# EAGLE board GPS lure (EAGLE 7.6.0)
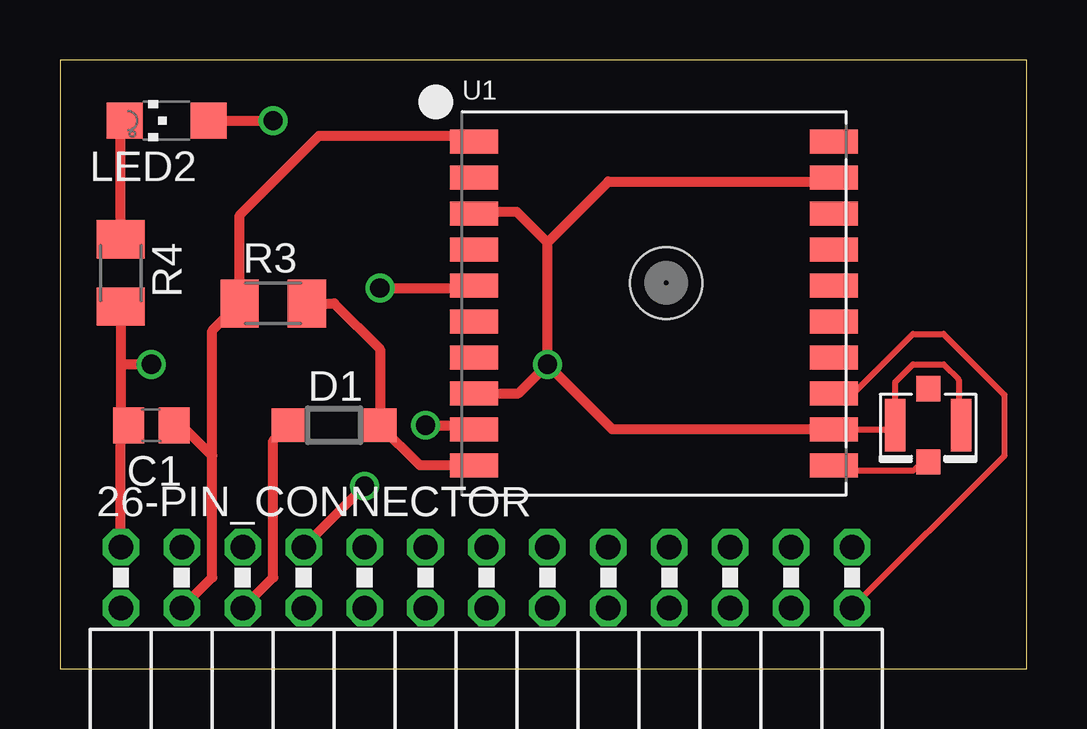
[diagram p0: board, top side]
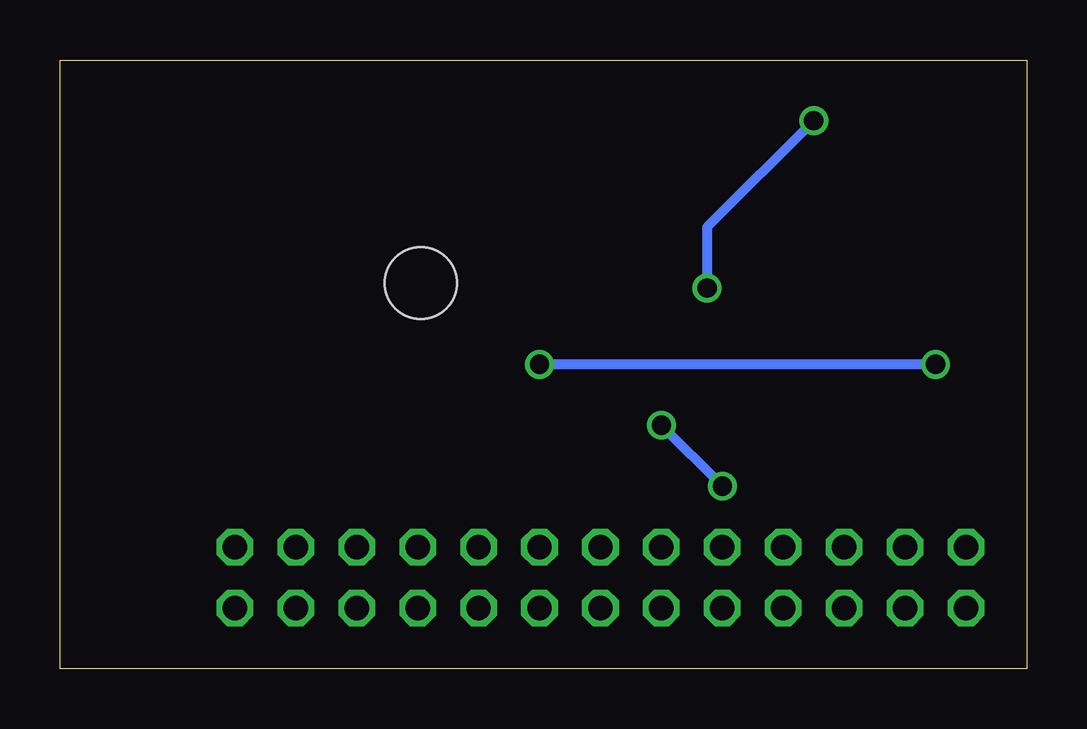
[diagram p1: board, bottom side, seen from below]

Size 40.31 x 25.39 mm. Coordinates in mm from the lower left corner, seen from the top.
Outline: 0,0 40.31,0 40.31,25.39 0,25.39 0,0
Copper layers (1*16): Top 0.035mm / dielectric 1.5mm / Bottom 0.035mm
Design rules "default": minimum track width 10mil, minimum drill 24mil, track to track 8mil, track to pad 8mil, pad to pad 8mil, via to via 8mil, smd to smd 8mil, copper to edge 40mil, drill to drill 8mil, minimum pad ring 10mil, minimum via ring 8mil, stop-mask expansion 4mil, vias tented up to drill 0mil, thermal gap 10mil

## Footprints (pad centres in the part's own frame; a part is rotated, then mirrored left to right if it is on the bottom)
FE13-2W = drill 1.016 octagon: 1 -15.24,1.27; 2 -15.24,-1.27; 3 -12.7,1.27; 4 -12.7,-1.27; 5 -10.16,1.27; 6 -10.16,-1.27; 7 -7.62,1.27; 8 -7.62,-1.27; 9 -5.08,1.27; 10 -5.08,-1.27; 11 -2.54,1.27; 12 -2.54,-1.27; 13 0,1.27; 14 0,-1.27; 15 2.54,1.27; 16 2.54,-1.27; 17 5.08,1.27; 18 5.08,-1.27; 19 7.62,1.27; 20 7.62,-1.27; 21 10.16,1.27; 22 10.16,-1.27; 23 12.7,1.27; 24 12.7,-1.27; 25 15.24,1.27; 26 15.24,-1.27
C0805 = smd 1.3 x 1.5: 1 -0.95,0; 2 0.95,0
SOD123 = smd 1.4 x 1.4: A 1.9,0; C -1.9,0
U.FL = smd 2.2 x 0.85: P$1 0,1.375; P$2 0,-1.375 | smd 1.05 x 1: P$3 1.525,0; P$4 -1.525,0
CHIPLED_1206 = smd 1.5 x 1.5: A 0,-1.75; C 0,1.75
M1206 = smd 1.6 x 2: 1 -1.4,0; 2 1.4,0
FGPMMOPA6H = smd 2 x 1: P$1 -7.5,6.75; P$2 -7.5,5.25; P$3 -7.5,3.75; P$4 -7.5,2.25; P$5 -7.5,0.75; P$6 -7.5,-0.75; P$7 -7.5,-2.25; P$8 -7.5,-3.75; P$9 -7.5,-5.25; P$10 -7.5,-6.75; P$11 7.5,-6.75; P$12 7.5,-5.25; P$13 7.5,-3.75; P$14 7.5,-2.25; P$15 7.5,-0.75; P$16 7.5,0.75; P$17 7.5,2.25; P$18 7.5,3.75; P$19 7.5,5.25; P$20 7.5,6.75 | hole 3: 0.5,0.85

## Placement (x,y rotation side)
26-PIN_CONNECTOR  [FE13-2W]  17.78,3.81 0 top
C1  .1pF  [C0805]  3.81,10.16 180 top
D1  1N4148  [SOD123]  11.43,10.16 0 top
J1  U.FL  [U.FL]  36.2,10.16 270 top
LED2  Red  [CHIPLED_1206]  4.45,22.86 90 top
R3  10k  [M1206]  8.89,15.24 0 top
R4  1k  [M1206]  2.54,16.51 270 top
U1  [FGPMMOPA6H]  24.77,15.24 0 top

## Library data of the parts
26-PIN_CONNECTOR = con-lsta; OC_FARNELL: unknown; OC_NEWARK: unknown
C1 R3 R4 = rcl
D1 = diode
J1 = SparkFun-Connectors; PROD_ID: CONN-09193
LED2 = led
U1 = adafruit

## Nets
3V3: 26-PIN_CONNECTOR.4 C1.1 R3.1 U1.P$1
EX_ANT: J1.P$3 U1.P$11
GND: 26-PIN_CONNECTOR.1 C1.2 J1.P$1 J1.P$2 R4.2 U1.P$3 U1.P$8 U1.P$12 U1.P$19
N$1: LED2.A U1.P$5
N$2: LED2.C R4.1
N$4: D1.A R3.2 U1.P$10
PPS: 26-PIN_CONNECTOR.26 U1.P$13
RX_OUT: 26-PIN_CONNECTOR.6 D1.C
TX: 26-PIN_CONNECTOR.7 U1.P$9

## Tracks (layer width: path | path; a pad name or v marks a point on that pad's centre or on a via)
3V3
  Top 0.406: 26-PIN_CONNECTOR.4 6.35,3.81 6.35,8.89 | 6.35,8.89 6.35,14.1 R3.1 7.49,18.92 10.79,22.23 17.03,22.23 U1.P$1 | C1.1 5.08,10.16 6.35,8.89
EX_ANT
  Top 0.254: J1.P$3 35.94,8.63 35.56,8.26 32.5,8.26 U1.P$11
GND  (via drill 0.8)
  Top 0.254: U1.P$12 34.65,9.99 J1.P$2 34.82,11.96 35.56,12.7 36.83,12.7 37.47,12.06 37.47,10.27 J1.P$1
  Top 0.406: 26-PIN_CONNECTOR.1 2.54,9.84 C1.2 2.54,10.48 2.54,12.7 | R4.2 2.54,12.7 | 17.2,19.05 U1.P$3 17.32,19.05 19.05,19.05 20.32,17.78 | U1.P$8 19.11,11.49 v20.32,12.7 | 20.32,17.78 22.86,20.32 32.09,20.32 U1.P$19 | U1.P$12 23.03,9.99 v20.32,12.7 | v3.81,12.7 2.54,12.7 | v20.32,12.7 20.32,17.78
  Bottom 0.406: v3.81,12.7 v20.32,12.7
N$1  (via drill 0.8)
  Top 0.406: LED2.A v8.89,22.86 | v13.34,15.88 17.15,15.88 U1.P$5
  Bottom 0.406: v8.89,22.86 13.34,18.41 v13.34,15.88
N$2
  Top 0.406: R4.1 2.54,22.7 LED2.C
N$4
  Top 0.406: R3.2 11.43,15.24 13.34,13.34 D1.A 15,8.49 U1.P$10
PPS
  Top 0.254: U1.P$13 33.08,11.49 35.56,13.97 36.83,13.97 39.37,11.43 39.37,8.89 26-PIN_CONNECTOR.26
RX_OUT
  Top 0.406: 26-PIN_CONNECTOR.6 8.89,3.81 8.89,9.52 D1.C
TX  (via drill 0.8)
  Top 0.406: 26-PIN_CONNECTOR.7 v12.7,7.62 | v15.24,10.16 17.09,10.16 U1.P$9
  Bottom 0.406: v12.7,7.62 v15.24,10.16